# Altium PCB Jukebox - Copy.PCBDOC
Units mil, origin at the board's own origin, x right, y up, seen from the top; angles counter-clockwise.
Board outline 8310.03 x 5810.03 mil, 2 copper layers (Top Layer, Bottom Layer); 146 components, 239 nets, 1143 pads, 0 vias.
Unrouted connection lines stored in the file: 669.
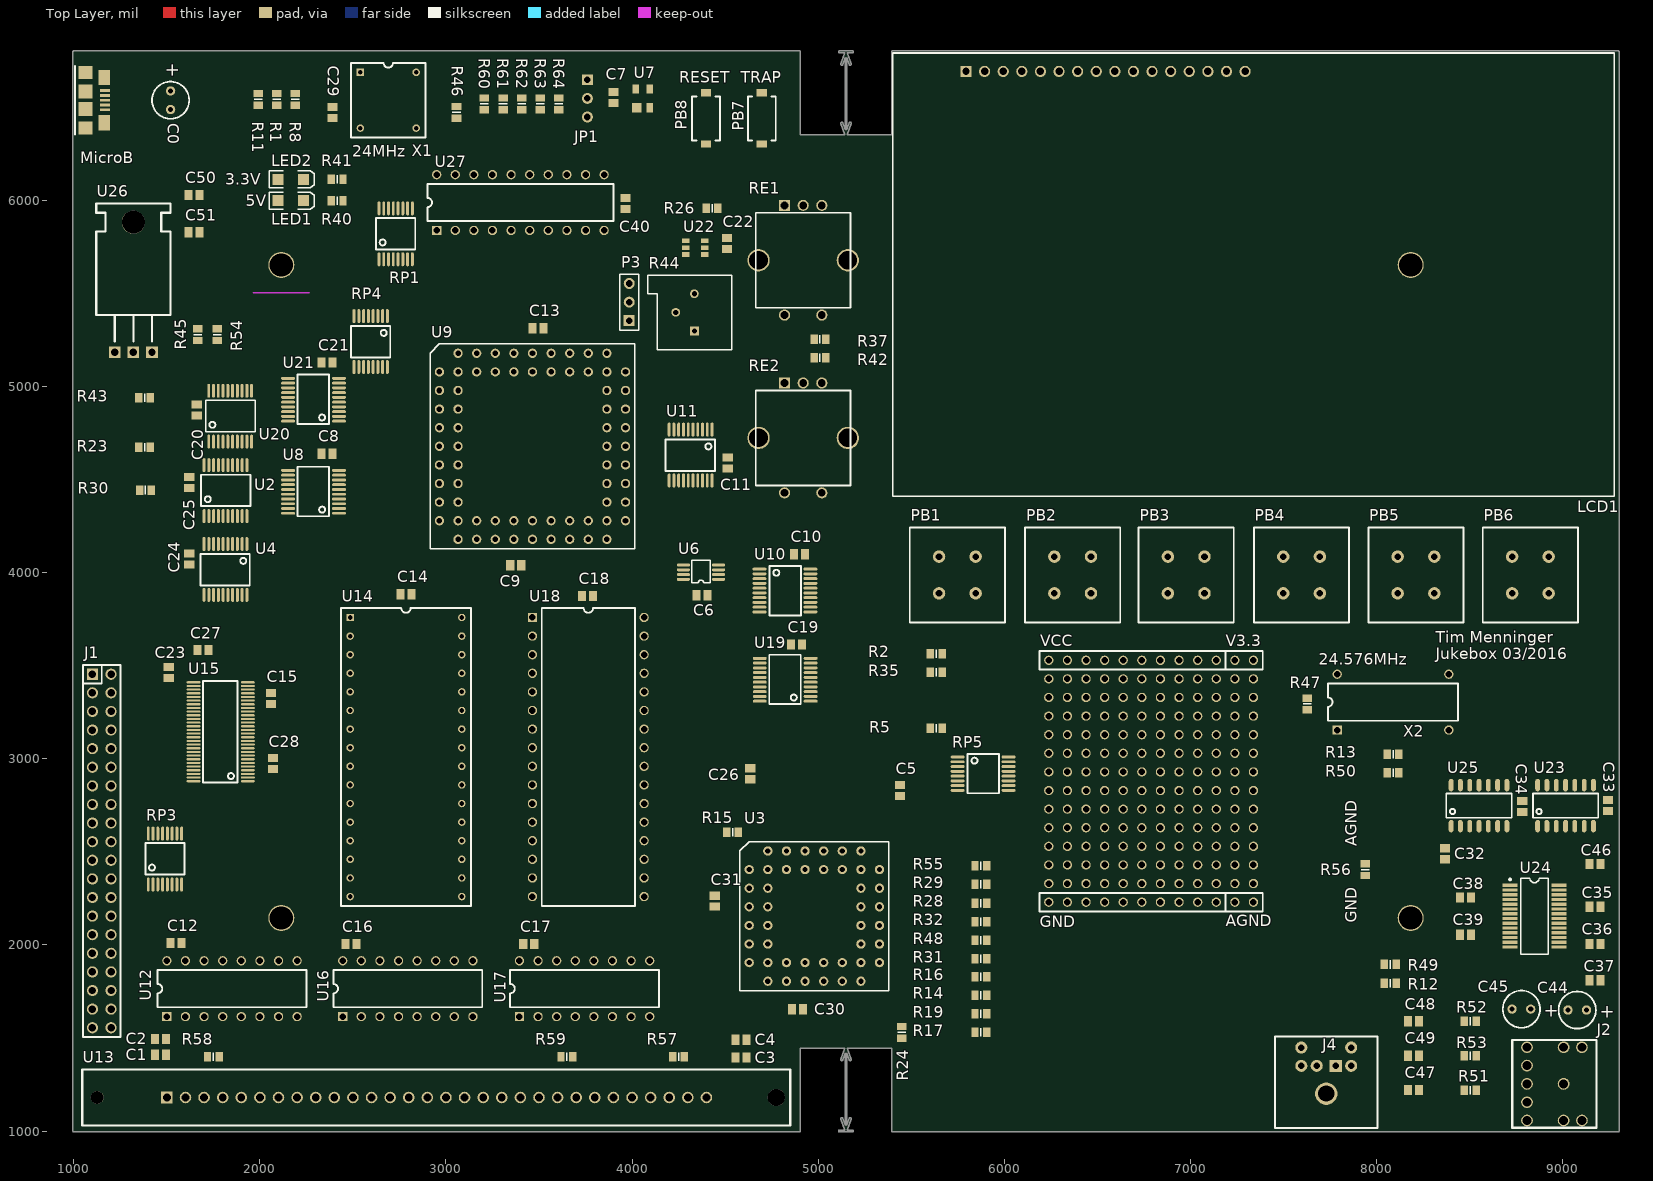
[diagram p0: Top Layer view]
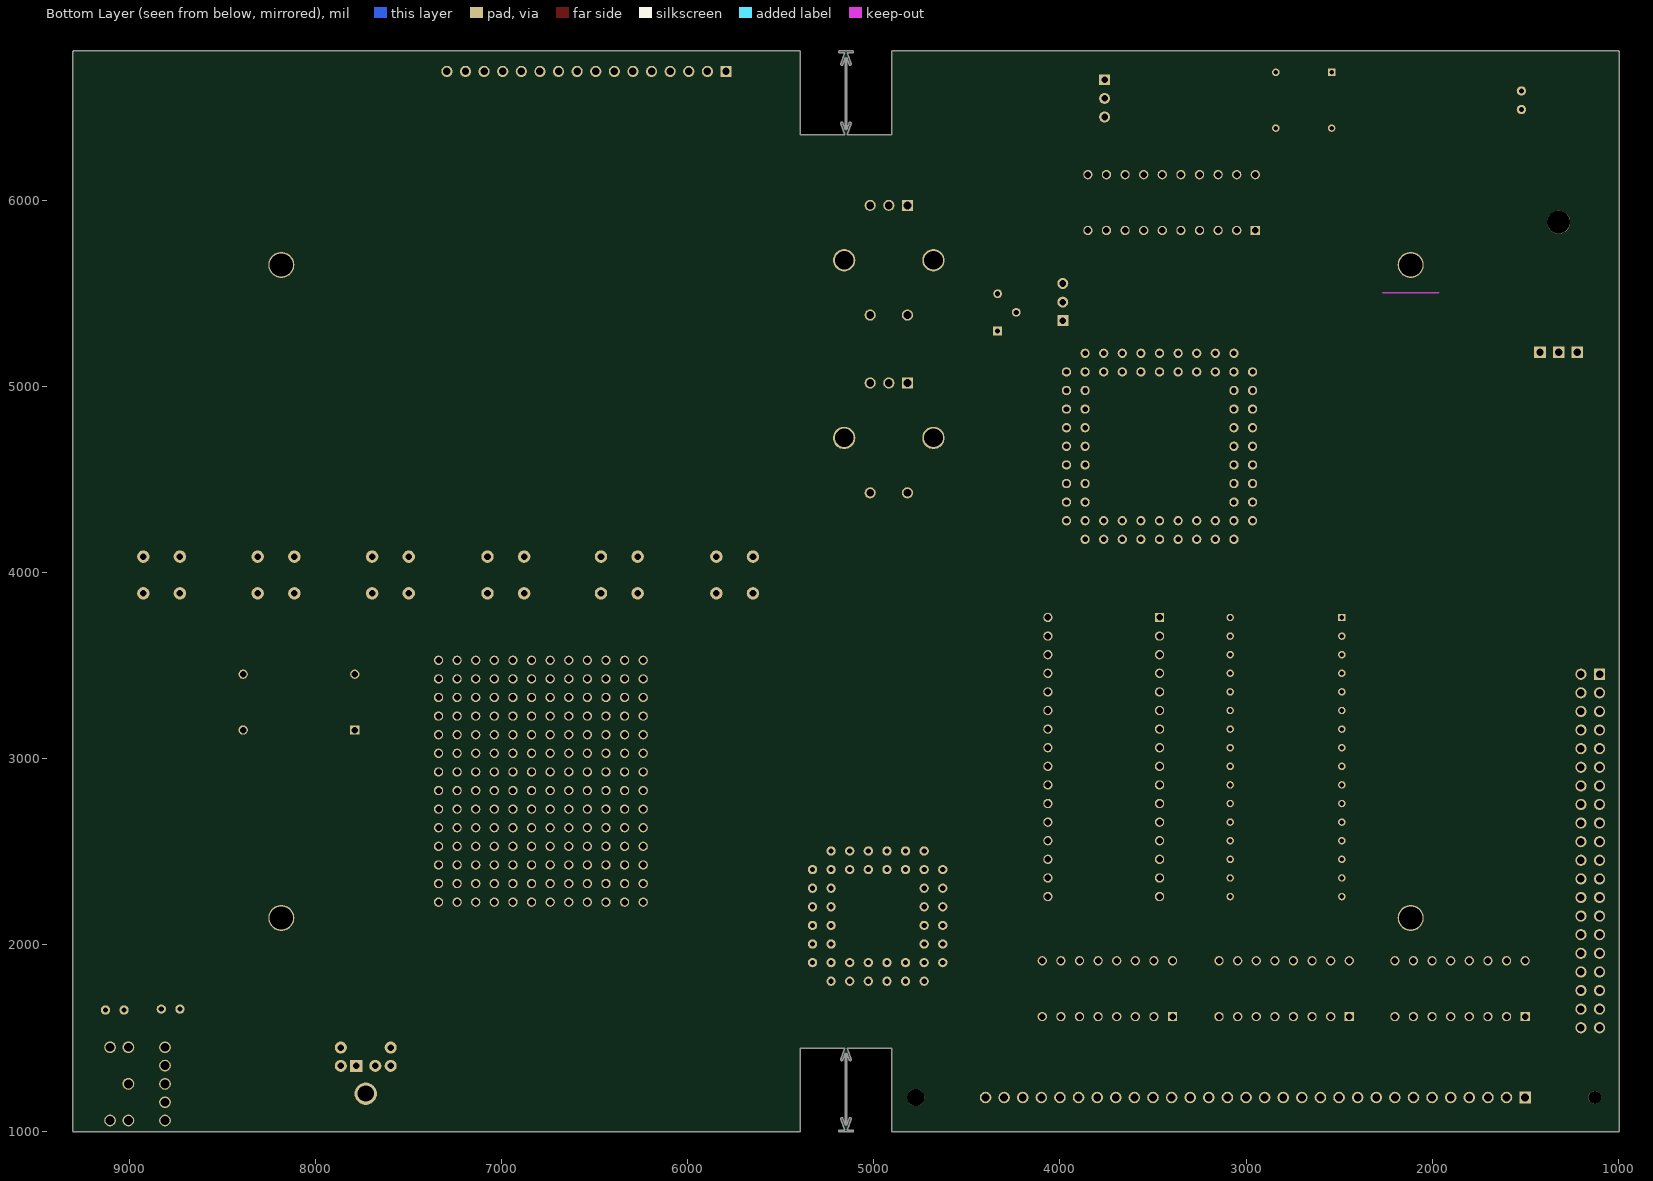
[diagram p1: Bottom Layer view, seen from below]

## Layer stack, top to bottom
Top Solder: solder mask 0.4, Solder Resist, Dk 3.5
Top Layer: signal copper 1.4
Dielectric1: dielectric 12.6, FR-4, Dk 4.8
Bottom Layer: signal copper 1.4
Bottom Solder: solder mask 0.4, Solder Resist, Dk 3.5

## Board outline
1000,994.99 cw(c1000,1000) 994.99,1000 994.99,6800 cw(c1000,6800) 1000,6805.02 4900,6805.02 cw(c4900,6800) 4905.02,6800 4905.02,6355.02 5143.04,6355.02 5122.95,6415.29 cw(c5127.71,6416.87) 5132.47,6418.46 5144.98,6380.9 5144.98,6769.1 5132.47,6731.54 cw(c5127.71,6733.13) 5122.95,6734.71 5143.04,6794.98 5115,6794.98 cw(c5115,6800) 5115,6805.02 5185,6805.02 cw(c5185,6800) 5190.02,6800 cw(c5185,6800) 5185,6794.98 5156.96,6794.98 5177.05,6734.71 cw(c5172.29,6733.13) 5177.31,6733.13 cw(c5172.29,6733.13) 5167.53,6731.54 5155.02,6769.1 5155.02,6380.9 5167.53,6418.46 cw(c5172.29,6416.87) 5177.31,6416.87 cw(c5172.29,6416.87) 5177.05,6415.29 5156.96,6355.02 5394.98,6355.02 5394.98,6800 cw(c5400,6800) 5400,6805.02 9300,6805.02 cw(c9300,6800) 9305.01,6800 9305.01,1000 cw(c9300,1000) 9300,994.99 5400,994.99 cw(c5400,1000) 5394.98,1000 5394.98,1444.98 5156.96,1444.98 5177.05,1384.71 cw(c5172.29,1383.13) 5177.31,1383.13 cw(c5172.29,1383.13) 5167.53,1381.54 5155.02,1419.1 5155.02,1030.9 5167.53,1068.46 cw(c5172.29,1066.87) 5177.31,1066.87 cw(c5172.29,1066.87) 5177.05,1065.29 5156.96,1005.01 5185,1005.01 cw(c5185,1000) 5190.02,1000 cw(c5185,1000) 5185,994.99 5115,994.99 cw(c5115,1000) 5115,1005.01 5143.04,1005.01 5122.95,1065.29 cw(c5127.71,1066.87) 5132.47,1068.46 5144.98,1030.9 5144.98,1419.1 5132.47,1381.54 cw(c5127.71,1383.13) 5122.95,1384.71 5143.04,1444.98 4905.02,1444.98 4905.02,1000 cw(c4900,1000) 4900,994.99

## Design rules (kind name [scope] priority, off if disabled: settings)
Clearance Clearance_9 [IsSMTPin vs IsFill] p1: gap=7.9
Clearance Clearance_8 [IsSMTPin vs IsVia] p2: gap=7.9
Clearance Clearance_7 [IsSMTPin vs IsSMTPin] p3: gap=7.8
Clearance Clearance_6 [IsThruPin vs IsFill] p4: gap=7.9
Clearance Clearance_5 [IsThruPin vs IsVia] p5: gap=7.9
Clearance Clearance_4 [IsThruPin vs IsSMTPin] p6: gap=7.8
Clearance Clearance_3 [IsThruPin vs IsThruPin] p7: gap=7.8
Clearance Clearance_2 [IsWire vs IsSMTPin] p8: gap=7.9
Clearance Clearance_1 [IsWire vs IsThruPin] p9: gap=7.9
Clearance [All] p10: gap=8
FabricationTestPointUsage TestPointUsage [All] p1: valid=0 allowmultiple=FALSE
FabricationTestpoint Testpoint [All] p1: side=3 testpointundercomponent=TRUE minsize=40 maxsize=100 preferedsize=60 minholesize=0 maxholesize=40 preferedholesize=32 testpointgrid=1 allowsidetop=TRUE allowsidebottom=TRUE usegrid=TRUE gridtolerance=0.01
PlaneClearance [All] p1: clearance=10
PolygonConnect [All] p1: connectstyle=Relief reliefconductorwidth=10 reliefentries=4 polygonreliefangle="90 Angle" airgapwidth=10
RoomDefinition "Jukebox Schematic" [InComponentClass('Jukebox Schematic')] p1: confinementstyle=ConfineIn formatcopy=TRUE lockcomponents=FALSE outline 0,0 2000,0 2000,1000 0,1000
RoomDefinition "Jukebox Processing" [InComponentClass('Jukebox Processing')] p2: confinementstyle=ConfineIn formatcopy=TRUE lockcomponents=FALSE outline 9350,14120 19430,14120 19430,15340 9350,15340
RoomDefinition "Jukebox Power" [InComponentClass('Jukebox Power')] p3: confinementstyle=ConfineIn formatcopy=TRUE lockcomponents=FALSE outline 9350,13140 21035,13140 21035,14070 9350,14070
RoomDefinition "Jukebox Peripherals" [InComponentClass('Jukebox Peripherals')] p4: confinementstyle=ConfineIn formatcopy=TRUE lockcomponents=FALSE outline 9350,5040 25580,5040 25580,13090 9350,13090
RoomDefinition "Jukebox Memory" [InComponentClass('Jukebox Memory')] p5: confinementstyle=ConfineIn formatcopy=TRUE lockcomponents=FALSE outline 9350,1055 16010,1055 16010,4990 9350,4990
RoutingVias [All] p1: holewidth=28 width=50 viastyle="Through Hole" minholewidth=28 minwidth=50 maxholewidth=28 maxwidth=50
SolderMaskExpansion [All] p1: expansion=2
UnpouredPolygon [All] p1: allowunpoured=FALSE
Width "Schematic Width Constraint_3" [InNet('VCC')] p1: maxlimit=30 minlimit=8 preferedwidth=30
Width "Schematic Width Constraint_2" [InNet('GND')] p2: maxlimit=30 minlimit=8 preferedwidth=30
Width "Schematic Width Constraint_1" [InNet('V3.3')] p3: maxlimit=30 minlimit=8 preferedwidth=30
Width "Schematic Width Constraint" [InNet('AGND')] p4: maxlimit=30 minlimit=8 preferedwidth=30
Width [All] p5: maxlimit=10 minlimit=10 preferedwidth=10
26 further rules are at their usual default settings.

## Classes and differential pairs
component class "Jukebox Memory": J1 R23 R30 R35 R57 R58 R59 RP3 U12 U13 U14 U15 U16 U17 U18
component class "Jukebox Peripherals": C44 C45 C46 C47 C48 C49 J2 J4 LCD1 P3 PB1 PB2 PB3 PB4 PB5 PB6 R12 R13 R24 R26 R37 R42 R43 R44 R47 R49 R50 R51 R52 R53 RE1 RE2 RP4 U19 U20 U21 U22 U23 U24 U25 X2
component class "Jukebox Power": C0 C1 C2 C3 C4 C5 C6 C7 C8 C9 C10 C11 C12 C13 C14 C15 C16 C17 C18 C19 C20 C21 C22 C23 C24 C25 C26 C27 C28 C29 C30 C31 C32 C33 C34 C35 C36 C37 C38 C39 C40 C50 C51 LED1 LED2 MicroB R40 R41 R45 R54 R56 U26
component class "Jukebox Processing": JP1 PB7 PB8 R1 R2 R5 R8 R11 R14 R15 R16 R17 R19 R28 R29 R31 R32 R46 R48 R55 R60 R61 R62 R63 R64 RP1 RP5 U2 U3 U4 U6 U7 U8 U9 U10 U11 U27 X1

## Components (designator, comment, footprint, x,y, rotation, side; value= is the part's Value field where it differs from the comment)
C0 "Cap Pol3" RB.1/.2 1520,6490 r90 top
C1 "Cap Pol3" C0805 1465,1410 r180 top
C2 "Cap" C0805 1465,1495 r180 top
C3 "Cap Pol3" C0805 4585,1395 r0 top
C4 "Cap" C0805 4585,1490 r0 top
C5 "Cap" C0805 5440,2830 r90 top
C6 "Cap" C0805 4375,3880 r0 top
C7 "Cap" C0805 3900,6555 r90 top
C8 "Cap" C0805 2360,4640 r0 top
C9 "Cap" C0805 3375,4040 r0 top
C10 "Cap" C0805 4900,4100 r180 top
C11 "Cap" C0805 4515,4590 r270 top
C12 "Cap" C0805 1550,2010 r0 top
C13 "Cap" C0805 3495,5315 r180 top
C14 "Cap" C0805 2785,3885 r180 top
C15 "Cap" C0805 2060,3325 r270 top
C16 "Cap" C0805 2490,2005 r0 top
C17 "Cap" C0805 3445,2005 r0 top
C18 "Cap" C0805 3760,3875 r180 top
C19 "Cap" C0805 4885,3615 r180 top
C20 "Cap" C0805 1660,4875 r270 top
C21 "Cap" C0805 2360,5130 r0 top
C22 "Cap" C0805 4510,5770 r90 top
C23 "Cap" C0805 1510,3465 r270 top
C24 "Cap" C0805 1620,4075 r270 top
C25 "Cap" C0805 1620,4485 r270 top
C26 "Cap" C0805 4635,2920 r90 top
C27 "Cap" C0805 1695,3585 r180 top
C28 "Cap" C0805 2070,2975 r90 top
C29 "Cap" C0805 2390,6475 r270 top
C30 "Cap" C0805 4890,1655 r180 top
C31 "Cap" C0805 4445,2235 r90 top
C32 "Cap" C0805 8370,2490 r90 top
C33 "Cap" C0805 9245,2750 r270 top
C34 "Cap" C0805 8785,2745 r90 top
C35 "Cap" C0805 9175,2205 r0 top
C36 "Cap" C0805 9175,2005 r0 top
C37 "Cap" C0805 9175,1810 r0 top
C38 "Cap" C0805 8480,2255 r180 top
C39 "Cap" C0805 8480,2055 r180 top
C40 "Cap" C0805 3965,5985 r90 top
C44 "Cap Pol3" RB.1/.2 9030,1650 r0 top
C45 "Cap Pol3" RB.1/.2 8730,1655 r0 top
C46 "Cap Pol3" C0805 9175,2435 r0 top
C47 "Cap" C0805 8200,1220 r180 top
C48 "Cap" C0805 8200,1590 r180 top
C49 "Cap" C0805 8200,1405 r180 top
C50 "Cap Pol3" C0805 1645,6030 r180 top
C51 "Cap Pol3" C0805 1645,5830 r180 top
J1 "IDE40" SIP2X20 1100,3455 r270 top
J2 "PHONEJACK STEREO SW" SJ1-352 8810,1450 r0 top
J4 "CON_MP3" MDIN6 7865,1350 r180 top
JP1 "3P_JP" HDR1X3 3760,6650 r270 top
LCD1 "NHD-0420DZ-FSW-FBW" 20x4Disp 5795,6695 r0 top
LED1 "5V PWR" 3.2X1.6X1.1 2165,6000 r0 top
LED2 "3.3V PWR" 3.2X1.6X1.1 2165,6115 r0 top
MicroB "Micro B" 10118192 1025,6725 r270 top
P3 "Header 3" HDR1X3 3985,5355 r90 top
PB1 "SW-PB" PB_EG4791 5650,3890 r0 top
PB2 "SW-PB" PB_EG4791 6270,3890 r0 top
PB3 "SW-PB" PB_EG4791 6880,3890 r0 top
PB4 "SW-PB" PB_EG4791 7500,3890 r0 top
PB5 "SW-PB" PB_EG4791 8115,3890 r0 top
PB6 "SW-PB" PB_EG4791 8730,3890 r0 top
PB7 "SWITCH-PBNC" KSR_PB_NC 4725,6285 r90 top
PB8 "SW-PB" KSR_PB_NC 4370,6600 r270 top
R1 "Res1" 6-0805_L 2090,6545 r270 top
R2 "Res1" 6-0805_L 5635,3565 r180 top
R5 "Res1" 6-0805_L 5635,3165 r180 top
R8 "Res1" 6-0805_L 2190,6545 r90 top
R11 "Res1" 6-0805_L 1990,6545 r270 top
R12 "Res1" 6-0805_L 8075,1795 r0 top
R13 "Res1" 6-0805_L 8090,3025 r180 top
R14 "Res1" 6-0805_L 5875,1730 r180 top
R15 "Res1" 6-0805_L 4540,2605 r0 top
R16 "Res1" 6-0805_L 5875,1830 r180 top
R17 "Res1" 6-0805_L 5875,1530 r180 top
R19 "Res1" 6-0805_L 5875,1630 r180 top
R23 "Res1" 6-0805_L 1380,4675 r180 top
R24 "Res1" 6-0805_L 5450,1530 r90 top
R26 "Res1" 6-0805_L 4430,5960 r0 top
R28 "Res1" 6-0805_L 5875,2225 r0 top
R29 "Res1" 6-0805_L 5875,2325 r0 top
R30 "Res1" 6-0805_L 1385,4445 r0 top
R31 "Res1" 6-0805_L 5875,1925 r0 top
R32 "Res1" 6-0805_L 5875,2125 r0 top
R35 "Res1" 6-0805_L 5635,3465 r0 top
R37 "Res1" 6-0805_L 5010,5255 r180 top
R40 "Res1" 6-0805_L 2415,6000 r180 top
R41 "Res1" 6-0805_L 2415,6115 r180 top
R42 "Res1" 6-0805_L 5010,5155 r180 top
R43 "Res1" 6-0805_L 1380,4940 r0 top
R44 "RPot" VR4 4285,5400 r90 top
R45 "Res1" 6-0805_L 1665,5280 r90 top
R46 "Res1" 6-0805_L 3056.65,6475 r90 top
R47 "Res1" 6-0805_L 7630,3295 r270 top
R48 "Res1" 6-0805_L 5875,2025 r0 top
R49 "Res1" 6-0805_L 8075,1895 r0 top
R50 "Res1" 6-0805_L 8090,2925 r180 top
R51 "Res1" 6-0805_L 8505,1220 r0 top
R52 "Res1" 6-0805_L 8505,1590 r0 top
R53 "Res1" 6-0805_L 8505,1405 r0 top
R54 "Res1" 6-0805_L 1770,5280 r90 top
R55 "Res1" 6-0805_L 5875,2425 r180 top
R56 "Res1" 6-0805_L 7940,2405 r270 top
R57 "Res1" 6-0805_L 4250,1400 r0 top
R58 "Res1" 6-0805_L 1750,1400 r0 top
R59 "Res1" 6-0805_L 3650,1400 r0 top
R60 "Res1" 6-0805_L 3206.65,6520 r270 top
R61 "Res1" 6-0805_L 3306.65,6520 r270 top
R62 "Res1" 6-0805_L 3406.65,6520 r270 top
R63 "Res1" 6-0805_L 3506.65,6520 r90 top
R64 "Res1" 6-0805_L 3606.65,6520 r90 top
RE1 "SW-ROTARY&PB" ROTENCPB 4820,5975 r0 top
RE2 "SW-ROTARY&PB" ROTENCPB 4820,5020 r0 top
RP1 "10K" SSOP16 2640,5685 r0 top
RP3 "10K" SSOP16 1400,2325 r0 top
RP4 "10K" SSOP16 2685,5380 r180 top
RP5 "10K" SSOP16 5750,3010 r270 top
U2 "74ALS245" SSOP20 1700,4305 r0 top
U3 "ISPLSI1016E" PLCCS44 4630,2505 r0 top
U4 "74ALS573" SSOP20 1930,4155 r180 top
U6 "MAX709" UMAX8 4465,3965 r180 top
U7 "MAX6816" SOT-143 4025,6500 r0 top
U8 "74ALS245" SSOP20 2425,4320 r90 top
U9 "80C188XL" PLCCS68I 2965,5180 r0 top
U10 "74ALS573" SSOP20 4685,4020 r270 top
U11 "74HCT244" SSOP20 4430,4770 r180 top
U12 "74LS158" DIP16 1500,1615 r90 top
U13 "TM124GU8A" SIMM30 1500,1180 r0 top
U14 "AM28F020-200PC" DIPS32 2485,3760 r0 top
U15 "74FCT162646" TSSOP56 1935,2880 r90 top
U16 "74LS158" DIP16 2445,1615 r90 top
U17 "74LS158" DIP16 3395,1615 r90 top
U18 "HM628128B" DIP32 3465,3760 r0 top
U19 "MAX6818" SSOP20 4960,3310 r90 top
U20 "74ALS245" SSOP20 1725,4705 r0 top
U21 "74ALS245" SSOP20 2425,4815 r90 top
U22 "MCP4013" SOT-23-6 4390,5710 r90 top
U23 "74LCX125" "SOIC 14" 9180,2605 r90 top
U24 "VS1011E" SOIC28 8850,2155 r270 top
U25 "74LCX125" "SOIC 14" 8715,2605 r90 top
U26 "LM1086" TO-220 1220,5185 r0 top
U27 "GAL16V8" DIP20 2950,5840 r90 top
X1 "OSCOE" DIPS8-4 2540,6690 r0 top
X2 "OSCOE" DIP14-4 7790,3155 r90 top

## Footprints (in the part's own frame and the unit in brackets; to place one, negate y for a bottom-side part, rotate by r counter-clockwise, add the part's x,y. Pads: shape width x height; smd on the part's side, far side on the other; paste and mask are expansions set on the pad)
3.2X1.6X1.1 [mm] "SMT LED; 2 Flat Leads"
  rect 1.5x1.5 smd: 1(-1.75,0) 2(1.75,0)
  silkscreen extent -2.9,-1.15 3.2,1.15
6-0805_L [mm] "Chip Resistor, Body 2.0x1.2mm, IPC High Density"
  rect 1x1.3 smd: 1(-0.8,0) 2(0.8,0)
  silkscreen extent 0,-0.55 0,0.55, body extent -1.07,-0.7 1.07,0.7, height 0.7
20x4Disp [mil]
  rect 60x60 hole 40: 1(0,0)
  round 60 hole 40: 2(100,0) 3(200,0) 4(300,0) 5(400,0) 6(500,0) 7(600,0) 8(700,0) 9(800,0) 10(900,0) 11(1000,0) 12(1100,0) 13(1200,0) 14(1300,0) 15(1400,0) 16(1500,0)
  silkscreen extent -394,-2283 3484,98
10118192 [mm] "Micro B USB"
  rect 0.4x1.35 smd: 1(3.4,3.625) 2(4.05,3.625) 3(4.7,3.625) 4(5.35,3.625) 5(6,3.625)
  rect 1.8x1.9 smd: ""(0.9,0.95) ""(8.5,0.95)
  rect 2.1x1.6 smd: ""(1.6,3.5) ""(7.8,3.5)
  rect 1.9x1.9 smd: ""(3.5,0.95) ""(5.9,0.95)
  silkscreen extent 0,-0.5 9.4,-0.5
C0805 [mm] "Chip Capacitor, Body 2.0x1.3mm, IPC High Density"
  rect 1.1x1.4 smd: 1(-0.75,0) 2(0.75,0)
  body extent -1.1,-0.72 1.1,0.72, height 1.4
DIP14-4 [mil]
  rect 50x50 hole 35: 1(0,0)
  round 50 hole 35: 2(0,-600) 3(300,-600) 4(300,0)
  silkscreen extent 50,-650 250,50
DIP16 [mil]
  rect 50x50 hole 35: 1(0,0)
  round 50 hole 35: 2(0,-100) 3(0,-200) 4(0,-300) 5(0,-400) 6(0,-500) 7(0,-600) 8(0,-700) 9(300,-700) 10(300,-600) 11(300,-500) 12(300,-400) 13(300,-300) 14(300,-200) 15(300,-100) 16(300,0)
  silkscreen extent 50,-750 250,50
DIP20 [mil]
  rect 50x50 hole 35: 1(0,0)
  round 50 hole 35: 2(0,-100) 3(0,-200) 4(0,-300) 5(0,-400) 6(0,-500) 7(0,-600) 8(0,-700) 9(0,-800) 10(0,-900) 11(300,-900) 12(300,-800) 13(300,-700) 14(300,-600) 15(300,-500) 16(300,-400) 17(300,-300) 18(300,-200) 19(300,-100) 20(300,0)
  silkscreen extent 50,-950 250,50
DIP32 [mil]
  rect 50x50 hole 35: 1(0,0)
  round 50 hole 35: 2(0,-100) 3(0,-200) 4(0,-300) 5(0,-400) 6(0,-500) 7(0,-600) 8(0,-700) 9(0,-800) 10(0,-900) 11(0,-1000) 12(0,-1100) 13(0,-1200) 14(0,-1300) 15(0,-1400) 16(0,-1500) 17(600,-1500) 18(600,-1400) 19(600,-1300) 20(600,-1200) 21(600,-1100) 22(600,-1000) 23(600,-900) 24(600,-800) 25(600,-700) 26(600,-600) 27(600,-500) 28(600,-400) 29(600,-300) 30(600,-200) 31(600,-100) 32(600,0)
  silkscreen extent 50,-1550 550,50
DIPS8-4 [mil]
  rect 40x40 hole 25: 1(0,0)
  round 40 hole 25: 2(0,-300) 3(300,-300) 4(300,0)
  silkscreen extent -50,-350 350,50
DIPS32 [mil]
  rect 40x40 hole 25: 1(0,0)
  round 40 hole 25: 2(0,-100) 3(0,-200) 4(0,-300) 5(0,-400) 6(0,-500) 7(0,-600) 8(0,-700) 9(0,-800) 10(0,-900) 11(0,-1000) 12(0,-1100) 13(0,-1200) 14(0,-1300) 15(0,-1400) 16(0,-1500) 17(600,-1500) 18(600,-1400) 19(600,-1300) 20(600,-1200) 21(600,-1100) 22(600,-1000) 23(600,-900) 24(600,-800) 25(600,-700) 26(600,-600) 27(600,-500) 28(600,-400) 29(600,-300) 30(600,-200) 31(600,-100) 32(600,0)
  silkscreen extent -50,-1550 650,50
HDR1X3 [mm] "Connector; Header; 3 Position"
  rect 1.5x1.5 hole 0.9: 1(0,0)
  round 1.5 hole 0.9: 2(2.54,0) 3(5.08,0)
KSR_PB_NC [mm] "Pushbutton SPST NC"
  rect 1x1.4 smd: 1(0.5,0.7) 2(7.5,0.7)
  silkscreen extent 1,-1.2 7,2.6
MDIN6 [mil]
  rect 65x65 hole 35: 1(82.68,0)
  round 65 hole 35: 2(185.04,0) 3(0,0) 4(267.72,0) 5(0,-98.43) 6(267.72,-98.43)
  round 120 hole 86: A(133.86,149.61)
  silkscreen extent -142,-157 409,335
PB_EG4791 [mm]
  round 1.7 hole 0.9: 1(0,5) 2(5,5) 3(0,0) 4(5,0)
  silkscreen extent -4,-4 9,9
PLCCS44 [mil]
  round 50 hole 28: 1(400,-100) 2(300,0) 3(300,-100) 4(200,0) 5(200,-100) 6(100,0) 7(0,-100) 8(100,-100) 9(0,-200) 10(100,-200) 11(0,-300) 12(100,-300) 13(0,-400) 14(100,-400) 15(0,-500) 16(100,-500) 17(0,-600) 18(100,-700) 19(100,-600) 20(200,-700) 21(200,-600) 22(300,-700) 23(300,-600) 24(400,-700) 25(400,-600) 26(500,-700) 27(500,-600) 28(600,-700) 29(700,-600) 30(600,-600) 31(700,-500) 32(600,-500) 33(700,-400) 34(600,-400) 35(700,-300) 36(600,-300) 37(700,-200) 38(600,-200) 39(700,-100) 40(600,0) 41(600,-100) 42(500,0) 43(500,-100) 44(400,0)
  silkscreen extent -50,-750 750,50
PLCCS68I [mil]
  round 50 hole 30: 1(0,-100) 2(100,-100) 3(0,-200) 4(100,-200) 5(0,-300) 6(100,-300) 7(0,-400) 8(100,-400) 9(0,-500) 10(100,-500) 11(0,-600) 12(100,-600) 13(0,-700) 14(100,-700) 15(0,-800) 16(100,-800) 17(0,-900) 18(100,-1000) 19(100,-900) 20(200,-1000) 21(200,-900) 22(300,-1000) 23(300,-900) 24(400,-1000) 25(400,-900) 26(500,-1000) 27(500,-900) 28(600,-1000) 29(600,-900) 30(700,-1000) 31(700,-900) 32(800,-1000) 33(800,-900) 34(900,-1000) 35(1000,-900) 36(900,-900) 37(1000,-800) 38(900,-800) 39(1000,-700) 40(900,-700) 41(1000,-600) 42(900,-600) 43(1000,-500) 44(900,-500) 45(1000,-400) 46(900,-400) 47(1000,-300) 48(900,-300) 49(1000,-200) 50(900,-200) 51(1000,-100) 52(900,0) 53(900,-100) 54(800,0) 55(800,-100) 56(700,0) 57(700,-100) 58(600,0) 59(600,-100) 60(500,0) 61(500,-100) 62(400,0) 63(400,-100) 64(300,0) 65(300,-100) 66(200,0) 67(200,-100) 68(100,0)
  silkscreen extent -50,-1050 1050,50
RB.1/.2 [mil]
  round 50 hole 28: 1(100,0) 2(0,0)
  silkscreen extent -50,-100 150,100
ROTENCPB [mil]
  rect 60x60 hole 42: 1(0,0)
  round 60 hole 42: 2(100,0) 3(200,0) 4(200,-590) 5(0,-590)
  round 120 hole 100: ""(-140,-295) ""(340,-295)
  silkscreen extent -155,-550 355,-40
SIMM30 [mil]
  rect 62x62 hole 42: 1(0,0)
  round 62 hole 42: 2(100,0) 3(200,0) 4(300,0) 5(400,0) 6(500,0) 7(600,0) 8(700,0) 9(800,0) 10(900,0) 11(1000,0) 12(1100,0) 13(1200,0) 14(1300,0) 15(1400,0) 16(1500,0) 17(1600,0) 18(1700,0) 19(1800,0) 20(1900,0) 21(2000,0) 22(2100,0) 23(2200,0) 24(2300,0) 25(2400,0) 26(2500,0) 27(2600,0) 28(2700,0) 29(2800,0) 30(2900,0)
  round 70 hole 70: ""(-375,0)
  round 92 hole 92: ""(3275,0)
  silkscreen extent -455,-150 3350,150
SIP2X20 [mil]
  rect 60x60 hole 40: 1(0,0)
  round 60 hole 40: 2(0,100) 3(100,0) 4(100,100) 5(200,0) 6(200,100) 7(300,0) 8(300,100) 9(400,0) 10(400,100) 11(500,0) 12(500,100) 13(600,0) 14(600,100) 15(700,0) 16(700,100) 17(800,0) 18(800,100) 19(900,0) 20(900,100) 21(1000,0) 22(1000,100) 23(1100,0) 24(1100,100) 25(1200,0) 26(1200,100) 27(1300,0) 28(1300,100) 29(1400,0) 30(1400,100) 31(1500,0) 32(1500,100) 33(1600,0) 34(1600,100) 35(1700,0) 36(1700,100) 37(1800,0) 38(1800,100) 39(1900,0) 40(1900,100)
  silkscreen extent -50,-50 1950,150
SJ1-352 [mm]
  round 1.6 hole 1.2: A(0,-10) B(0,-7.5) C(0,-2.5) D(0,0) E(5,-5) ""(0,-5) ""(5,-10) ""(5,0) ""(7.5,-10) ""(7.5,0)
  silkscreen extent -2,-11 9.5,1
SOIC28 [mm] "SSOP; 28 Leads; Body Width 5.3 mm; Pitch 0.65 mm"
  rect 0.45x2.05 smd: 1(-4.225,-3.325) 2(-3.575,-3.325) 3(-2.925,-3.325) 4(-2.275,-3.325) 5(-1.625,-3.325) 6(-0.975,-3.325) 7(-0.325,-3.325) 8(0.325,-3.325) 9(0.975,-3.325) 10(1.625,-3.325) 11(2.275,-3.325) 12(2.925,-3.325) 13(3.575,-3.325) 14(4.225,-3.325) 15(4.225,3.325) 16(3.575,3.325) 17(2.925,3.325) 18(2.275,3.325) 19(1.625,3.325) 20(0.975,3.325) 21(0.325,3.325) 22(-0.325,3.325) 23(-0.975,3.325) 24(-1.625,3.325) 25(-2.275,3.325) 26(-2.925,3.325) 27(-3.575,3.325) 28(-4.225,3.325)
  silkscreen extent -5.2,-3.45 5.2,1.9
"SOIC 14" [mm]
  oval 1.7x0.65 smd: 1(0.85,7.945) 2(0.85,6.675) 3(0.85,5.405) 4(0.85,4.135) 5(0.85,2.865) 6(0.85,1.595) 7(0.85,0.325) 8(6.45,0.325) 9(6.45,1.595) 10(6.45,2.865) 11(6.45,4.135) 12(6.45,5.405) 13(6.45,6.675) 14(6.45,7.945)
  silkscreen extent 2,-0.33 5.3,8.6
SOT-23-6 [mil]
  rect 26x40 smd: 1(0,0) 2(37.5,0) 3(75,0) 4(75,102) 5(37.5,102) 6(0,102)
SOT-143 [mil]
  rect 50x50 smd: 1(0,0)
  rect 35x50 smd: 2(70,0) 3(70,100) 4(-5,100)
SSOP16 [mm]
  oval 0.4x1.9 smd: 1(0,0) 2(0.65,0) 3(1.3,0) 4(1.95,0) 5(2.6,0) 6(3.25,0) 7(3.9,0) 8(4.55,0) 9(4.55,6.95) 10(3.9,6.95) 11(3.25,6.95) 12(2.6,6.95) 13(1.95,6.95) 14(1.3,6.95) 15(0.65,6.95) 16(0,6.95)
  silkscreen extent -0.4,1.35 4.95,5.65
SSOP20 [mm]
  oval 0.4x1.9 smd: 1(0,0) 2(0.65,0) 3(1.3,0) 4(1.95,0) 5(2.6,0) 6(3.25,0) 7(3.9,0) 8(4.55,0) 9(5.2,0) 10(5.85,0) 11(5.85,6.95) 12(5.2,6.95) 13(4.55,6.95) 14(3.9,6.95) 15(3.25,6.95) 16(2.6,6.95) 17(1.95,6.95) 18(1.3,6.95) 19(0.65,6.95) 20(0,6.95)
  silkscreen extent -0.4,1.35 6.35,5.65
TO-220 [mil]
  round 125 hole 125: 0(100,700)
  rect 62x62 hole 40: 1(0,0) 2(100,0) 3(200,0)
  silkscreen extent -100,60 300,800
TSSOP56 [mm]
  oval 0.3x1.9 smd: 1(0,0) 2(0.5,0) 3(1,0) 4(1.5,0) 5(2,0) 6(2.5,0) 7(3,0) 8(3.5,0) 9(4,0) 10(4.5,0) 11(5,0) 12(5.5,0) 13(6,0) 14(6.5,0) 15(7,0) 16(7.5,0) 17(8,0) 18(8.5,0) 19(9,0) 20(9.5,0) 21(10,0) 22(10.5,0) 23(11,0) 24(11.5,0) 25(12,0) 26(12.5,0) 27(13,0) 28(13.5,0) 29(13.5,7.4) 30(13,7.4) 31(12.5,7.4) 32(12,7.4) 33(11.5,7.4) 34(11,7.4) 35(10.5,7.4) 36(10,7.4) 37(9.5,7.4) 38(9,7.4) 39(8.5,7.4) 40(8,7.4) 41(7.5,7.4) 42(7,7.4) 43(6.5,7.4) 44(6,7.4) 45(5.5,7.4) 46(5,7.4) 47(4.5,7.4) 48(4,7.4) 49(3.5,7.4) 50(3,7.4) 51(2.5,7.4) 52(2,7.4) 53(1.5,7.4) 54(1,7.4) 55(0.5,7.4) 56(0,7.4)
  silkscreen extent -0.2,1.4 13.7,6.1
UMAX8 [mm]
  oval 1.8x0.4 smd: 1(0,0) 2(0,-0.65) 3(0,-1.3) 4(0,-1.95) 5(4.8,-1.95) 6(4.8,-1.3) 7(4.8,-0.65) 8(4.8,0)
  silkscreen extent 1.15,-2.6 3.65,0.5
VR4 [mm] "Thru-Hole; 3 Leads"
  rect 1.2x1.2 hole 0.7: 1(-2.54,-1.27)
  round 1.2 hole 0.7: 2(0,1.27) 3(2.54,-1.27)
  silkscreen extent -5.08,-6.35 5.08,5.08

## Part data
C0 C1 C3 C44 C45 C46 C50 C51: "Polarized Capacitor (Surface Mount)"
C2 C4 C5 C6 C7 C8 C9 C10 C11 C12 C13 C14 C15 C16 C17 C18 C19 C20 C21 C22 C23 C24 C25 C26 C27 C28 C29 C30 C31 C32 C33 C34 C35 C36 C37 C38 C39 C40 C47 C48 C49: "Capacitor"
J1: "40-Pin IDE Connector"
J2: "3.5mm Stereo Jack with Switches"
J4: "MP3 Connector"
LCD1: library part LCDBL16PIN, "Single E LCD with Backlight"
LED1 LED2: library part LED2, "Typical RED, GREEN, YELLOW, AMBER GaAs LED"
MicroB: library part "10118192 Micro B USB"
P3: "Header, 3-Pin"
PB1 PB2 PB3 PB4 PB5 PB6 PB8: "Switch"
PB7: "Normally Closed Pushbutton Switch"
R1 R2 R5 R8 R11 R12 R13 R14 R15 R16 R17 R19 R23 R24 R26 R28 R29 R30 R31 R32 R35 R37 R40 R41 R42 R43 R45 R46 R47 R48 R49 R50 R51 R52 R53 R54 R55 R56 R57 R58 R59 R60 R61 R62 R63 R64: "Resistor"
R44: "Potentiometer"
RE1 RE2: "Rotary Encoder with Built-In Push Button"
RP1 RP3 RP4 RP5: library part RPACK8, "Resistor Pack - 8 Resistors"
U2 U8 U20 U21: "Octal Bus Transceiver"
U3: library part ISPLSI1016, "In-System Programmable High Density CPLD"
U4 U10: "Octal Transparent Latch"
U6: "Maxim Power-On Reset"
U7: "Single Switch Debouncer"
U9: "Intel 80188 Microprocessor"
U11: "Octal Buffer"
U13: library part DRAM1MX8, "1M x 8 DRAM SIMM"
U14: library part UNIROM, "Universal EPROM/EEROM Socket"
U15: library part 74FCT16646, "16-Bit Bus Transceiver/Register"
U18: library part UNIRAM, "Universal RAM Socket"
U19: "Octal Switch Debouncer"
U26: "1.5A Low Dropout Positive Regulator"
X1 X2: "Oscillator with Active High Output Enable"

## Free pads (board coordinates)
  round 140 hole 125: 1(2115,2145) 2(2115,5655) 3(8185,2145) 4(8185,5655)
  round 50 hole 35: 26(6240,2230) 26(6340,2230) 26(6440,2230) 26(6540,2230) 26(6640,2230) 26(6740,2230) 26(6840,2230) 26(6940,2230) 26(7040,2230) 26(7140,2230) 26(7240,2230) 26(7340,2230) 27(6240,2330) 27(6340,2330) 27(6440,2330) 27(6540,2330) 27(6640,2330) 27(6740,2330) 27(6840,2330) 27(6940,2330) 27(7040,2330) 27(7140,2330) 27(7240,2330) 27(7340,2330) 28(6240,2430) 28(6340,2430) 28(6440,2430) 28(6540,2430) 28(6640,2430) 28(6740,2430) 28(6840,2430) 28(6940,2430) 28(7040,2430) 28(7140,2430) 28(7240,2430) 28(7340,2430) 29(6240,2530) 29(6340,2530) 29(6440,2530) 29(6540,2530) 29(6640,2530) 29(6740,2530) 29(6840,2530) 29(6940,2530) 29(7040,2530) 29(7140,2530) 29(7240,2530) 29(7340,2530) 30(6240,2630) 30(6340,2630) 30(6440,2630) 30(6540,2630) 30(6640,2630) 30(6740,2630) 30(6840,2630) 30(6940,2630) 30(7040,2630) 30(7140,2630) 30(7240,2630) 30(7340,2630) 31(6240,2730) 31(6340,2730) 31(6440,2730) 31(6540,2730) 31(6640,2730) 31(6740,2730) 31(6840,2730) 31(6940,2730) 31(7040,2730) 31(7140,2730) 31(7240,2730) 31(7340,2730) 32(6240,2830) 32(6340,2830) 32(6440,2830) 32(6540,2830) 32(6640,2830) 32(6740,2830) 32(6840,2830) 32(6940,2830) 32(7040,2830) 32(7140,2830) 32(7240,2830) 32(7340,2830) 33(6240,2930) 33(6340,2930) 33(6440,2930) 33(6540,2930) 33(6640,2930) 33(6740,2930) 33(6840,2930) 33(6940,2930) 33(7040,2930) 33(7140,2930) 33(7240,2930) 33(7340,2930) 34(6240,3030) 34(6340,3030) 34(6440,3030) 34(6540,3030) 34(6640,3030) 34(6740,3030) 34(6840,3030) 34(6940,3030) 34(7040,3030) 34(7140,3030) 34(7240,3030) 34(7340,3030) 35(6240,3130) 35(6340,3130) 35(6440,3130) 35(6540,3130) 35(6640,3130) 35(6740,3130) 35(6840,3130) 35(6940,3130) 35(7040,3130) 35(7140,3130) 35(7240,3130) 35(7340,3130) 36(6240,3230) 36(6340,3230) 36(6440,3230) 36(6540,3230) 36(6640,3230) 36(6740,3230) 36(6840,3230) 36(6940,3230) 36(7040,3230) 36(7140,3230) 36(7240,3230) 36(7340,3230) 37(6240,3330) 37(6340,3330) 37(6440,3330) 37(6540,3330) 37(6640,3330) 37(6740,3330) 37(6840,3330) 37(6940,3330) 37(7040,3330) 37(7140,3330) 37(7240,3330) 37(7340,3330) 38(6240,3430) 38(6340,3430) 38(6440,3430) 38(6540,3430) 38(6640,3430) 38(6740,3430) 38(6840,3430) 38(6940,3430) 38(7040,3430) 38(7140,3430) 38(7240,3430) 38(7340,3430) 39(6240,3530) 39(6340,3530) 39(6440,3530) 39(6540,3530) 39(6640,3530) 39(6740,3530) 39(6840,3530) 39(6940,3530) 39(7040,3530) 39(7140,3530) 39(7240,3530) 39(7340,3530)

## Nets (pads, with @x,y where several pads share a name; then routed paths per layer and width w, separated by ;. In a path a pad name is that pad's centre, name@x,y a point inside that pad or via, vN(x,y) a via of type N, cw(c..) or ccw(c..) an arc to the next point about the centre after c; other vN are vias at no path point)
3.3V: LED2.1
A0: U3.9 U4.12 U12.3 U14.12 U18.12
A1: U4.13 U12.6 U14.11 U18.11
A2: U4.14 U12.13 U14.10 U18.10
A3: U4.15 U12.10 U14.9 U18.9
A4: U4.16 U14.8 U16.3 U18.8
A5: U4.17 U14.7 U16.6 U18.7
A6: U4.18 U14.6 U16.13 U18.6
A7: U4.19 U14.5 U16.10 U18.5
A8: U8.18 U14.27 U17.3 U18.27
A9: J1.35 U8.17 U14.26 U17.6 U18.26
A10: J1.33 U8.16 U12.2 U14.23 U18.23
A11: J1.36 U8.15 U12.5 U14.25 U18.25
A12: U8.14 U12.14 U14.4 U18.4
A13: U8.13 U12.11 U14.28 U18.28
A14: U8.12 U14.29 U16.2 U18.3
A15: U8.11 U14.3 U16.5 U18.31
A16: U10.19 U14.2 U16.14 U18.2
A17: U10.18 U14.30 U16.11 U18.1
A18: U10.17 U17.2
A19: U10.16 U17.5
AGND: C33.1 C34.1 C35.1 C36.1 C37.1 C38.1 C39.1 C46.2 C47.2 C48.2 C49.2 pad.26@7240,2230 pad.26@7340,2230 R13.1 R41.1 R50.1 R56.1 U23.1 U23.4 U23.7 U23.10 U23.13 U24.18 U24.21 U24.25 U25.1 U25.4 U25.7 U25.10 U25.13
ALE: U3.3 U11.12
CLK: U3.11 U11.14 U27.1
CPU_A8: U8.2 U9.16
CPU_A9: U8.3 U9.14
CPU_A10: U8.4 U9.12
CPU_A11: U8.5 U9.10
CPU_A12: U8.6 U9.7
CPU_A13: U8.7 U9.5
CPU_A14: U8.8 U9.3
CPU_A15: U8.9 U9.1
CPU_A16: U9.68 U10.2
CPU_A17: U9.67 U10.3
CPU_A18: U9.66 U10.4
CPU_A19: U9.65 U10.5
CPU_AD0: U2.2 U4.9 U9.17
CPU_AD1: U2.3 U4.8 U9.15
CPU_AD2: U2.4 U4.7 U9.13
CPU_AD3: U2.5 U4.6 U9.11
CPU_AD4: U2.6 U4.5 U9.8
CPU_AD5: U2.7 U4.4 U9.6
CPU_AD6: U2.8 U4.3 U9.4
CPU_AD7: U2.9 U4.2 U9.2
CPU_ALE: U4.11 U9.61 U10.11 U11.8
CPU_CLK: U9.56 U11.6
CPU_DEN: U2.19 U9.39
CPU_DTR: U2.1 U9.40 U11.11
CPU_RD: U9.62 U11.2
CPU_WR: U9.63 U11.4
D0: J4.2 U2.18 U13.3 U14.13 U15.5 U15.24 U18.13 U19.12 U20.2 U21.11 U25.5
D1: U2.17 U13.6 U14.14 U15.6 U15.23 U18.14 U19.13 U20.3 U21.12
D2: U2.16 U13.10 U14.15 U15.8 U15.21 U18.15 U19.14 U20.4 U21.13
D3: U2.15 U13.13 U14.17 U15.9 U15.20 U18.17 U19.19 U20.5 U21.14
D4: U2.14 U13.16 U14.18 U15.10 U15.19 U18.18 U19.18 U20.6
D5: U2.13 U13.20 U14.19 U15.12 U15.17 U18.19 U19.17 U20.7
D6: U2.12 U13.23 U14.20 U15.13 U15.16 U18.20 U19.16 U20.8
D7: U2.11 U13.25 U14.21 U15.14 U15.15 U18.21 U19.15 U20.9
DEN: U3.4
DISP_CS: LCD1.4 U27.17
DISP_DIR: U20.1 U27.19
DISP_E: LCD1.6 U27.15
DISP_RW: LCD1.5 U27.16
DRAM_CAS: R58.2 U3.19
DRAM_RAS: R57.2 U3.22
DRAM_WE: R59.2 U3.20
DTR: U3.44 U11.9 U27.6
GND: C0.2 C1.2 C2.1 C3.2 C4.1 C5.1 C6.1 C7.1 C8.1 C9.1 C10.1 C11.1 C12.1 C13.1 C14.1 C15.1 C16.1 C17.1 C18.1 C19.1 C20.1 C21.1 C22.1 C23.1 C24.1 C25.1 C26.1 C27.1 C28.1 C29.1 C30.1 C31.1 C32.1 C40.1 C50.2 C51.2 J1.2 J1.19 J1.22 J1.24 J1.26 J1.28 J1.30 J1.40 MicroB.5 pad.26@6240,2230 pad.26@6340,2230 pad.26@6440,2230 pad.26@6540,2230 pad.26@6640,2230 pad.26@6740,2230 pad.26@6840,2230 pad.26@6940,2230 pad.26@7040,2230 pad.26@7140,2230 PB1.1 PB2.1 PB3.1 PB4.1 PB5.1 PB6.1 PB8.1 R2.2 R12.1 R26.2 R28.2 R29.2 R31.2 R32.2 R40.1 R42.2 R44.2 R45.2 R48.2 R49.1 R55.2 R56.2 R60.1 R61.1 R62.1 R63.2 R64.2 RE1.2 RE1.5 RE2.2 RE2.5 RP1.1 RP1.4 RP1.8 RP3.1 RP3.2 RP3.4 RP3.5 RP3.7 RP3.8 U2.10 U3.1 U3.23 U4.1 U4.10 U6.3 U7.1 U8.10 U8.19 U9.26 U9.60 U10.1 U10.10 U11.1 U11.10 U11.19 U12.8 U12.15 U13.9 U13.22 U14.16 U15.4 U15.11 U15.18 U15.25 U15.32 U15.39 U15.46 U15.53 U16.8 U16.15 U17.8 U17.10 U17.11 U17.13 U17.14 U17.15 U18.16 U19.10 U20.10 U20.19 U21.10 U22.2 U24.6 U24.10 U24.27 U27.10 X1.2 X2.2
IDE_1DIR: U3.8 U15.1
IDE_1OE: U3.7 U15.56
IDE_2CLKBA: U3.6 U15.30
IDE_2OE: U3.16 U15.29
IDE_CS0: J1.37 U3.17
IDE_DIOR: J1.23 U3.15
IDE_DIOW: J1.25 U3.21
INT0: U9.45 U19.11
INT1: U9.44 U11.7
INT2: U9.42 U11.5
LCS: U9.33 U18.22
MCS0: U3.39 U9.38
MCS1: U3.37 U9.37
MCS2: U3.38 U9.36
MCS3: U3.43 U9.35
MP3_CLK: J4.1 U3.31 U25.2
MP3_DEMAND: J4.3 R24.2 U11.15
MP3_DREQ: U11.13 U24.1
MP3_XCS: U3.32 U23.9
MP3_XDCS: U3.30 U23.12
MUX_S: U3.18 U12.1 U16.1 U17.1
NetC44_1: C44.1 U24.20
NetC44_2: C44.2 J2.D R52.2
NetC45_1: C45.1 U24.24
NetC45_2: C45.2 J2.A R51.2
NetC46_1: C46.1 U24.22
NetC47_1: C47.1 R51.1
NetC48_1: C48.1 R52.1
NetC49_1: C49.1 R53.1
NetJ1_3: J1.3 U15.43
NetJ1_4: J1.4 U15.33
NetJ1_5: J1.5 U15.44
NetJ1_6: J1.6 U15.34
NetJ1_7: J1.7 U15.45
NetJ1_8: J1.8 U15.36
NetJ1_9: J1.9 U15.47
NetJ1_10: J1.10 U15.37
NetJ1_11: J1.11 U15.48
NetJ1_12: J1.12 U15.38
NetJ1_13: J1.13 U15.49
NetJ1_14: J1.14 U15.40
NetJ1_15: J1.15 U15.51
NetJ1_16: J1.16 U15.41
NetJ1_17: J1.17 U15.52
NetJ1_18: J1.18 U15.42
NetJ1_29: J1.29 R23.1
NetJ1_38: J1.38 R30.1
NetJ2_E: J2.E R53.2
NetJP1_1: JP1.1 U7.3
NetJP1_2: JP1.2 U9.46
NetJP1_3: JP1.3 R8.1
NetLCD1_3: LCD1.3 P3.2
NetLCD1_7: LCD1.7 U20.18
NetLCD1_8: LCD1.8 U20.17
NetLCD1_9: LCD1.9 U20.16
NetLCD1_10: LCD1.10 U20.15
NetLCD1_11: LCD1.11 U20.14
NetLCD1_12: LCD1.12 U20.13
NetLCD1_13: LCD1.13 U20.12
NetLCD1_14: LCD1.14 U20.11
NetLCD1_15: LCD1.15 R37.1
NetLCD1_16: LCD1.16 R42.1
NetLED1_2: LED1.2 R40.2
NetLED2_2: LED2.2 R41.2
NetP3_1: P3.1 R44.3
NetP3_3: P3.3 U22.5
NetPB1_2: PB1.2 U19.6
NetPB2_2: PB2.2 U19.5
NetPB3_2: PB3.2 U19.4
NetPB4_2: PB4.2 U19.3
NetPB5_2: PB5.2 U19.2
NetPB6_2: PB6.2 U19.7
NetPB7_2: PB7.2 R1.2 R2.1 U6.2
NetPB8_2: PB8.2 U7.2
NetR5_2: R5.2 U3.13
NetR11_2: R11.2 U8.1
NetR12_2: R12.2 U24.16
NetR13_2: R13.2 U25.9
NetR14_2: R14.2 U3.33
NetR15_2: R15.2 U3.2
NetR16_2: R16.2 U3.36
NetR17_2: R17.2 U3.24
NetR19_2: R19.2 U3.14
NetR26_1: R26.1 U22.6
NetR28_1: R28.1 U3.27
NetR29_1: R29.1 U3.25
NetR31_1: R31.1 U3.26
NetR32_1: R32.1 U3.29
NetR35_1: R35.1 U18.30
NetR43_2: R43.2 U21.19
NetR45_1: R45.1 R54.1 U26.1
NetR46_2: R46.2 X1.1
NetR47_2: R47.2 X2.1
NetR48_1: R48.1 U3.28
NetR49_2: R49.2 U24.17
NetR50_2: R50.2 U25.12
NetR55_1: R55.1 U3.10
NetR57_1: R57.1 U13.27
NetR58_1: R58.1 U13.2
NetR59_1: R59.1 U13.21
NetR60_2: R60.2 U27.7
NetR61_2: R61.2 U27.8
NetR62_2: R62.2 U27.9
NetR63_1: R63.1 U27.12
NetR64_1: R64.1 U27.11
NetRE1_1: RE1.1 RP4.9 U21.9
NetRE1_3: RE1.3 RP4.10 U21.8
NetRE1_4: RE1.4 U19.8
NetRE2_1: RE2.1 RP4.11 U21.7
NetRE2_3: RE2.3 RP4.12 U21.6
NetRE2_4: RE2.4 U19.9
NetRP1_9: RP1.9 U9.55
NetRP1_10: RP1.10 U9.50
NetRP1_11: RP1.11 U9.41
NetRP1_13: RP1.13 U9.19
NetRP1_14: RP1.14 U9.21
NetRP1_15: RP1.15 U9.20
NetRP1_16: RP1.16 U9.18
NetRP3_9: RP3.9 U15.2
NetRP3_10: RP3.10 U15.3
NetRP3_11: RP3.11 U15.26
NetRP3_12: RP3.12 U15.27
NetRP3_13: RP3.13 U15.28
NetRP3_14: RP3.14 U15.31
NetRP3_15: RP3.15 U15.54
NetRP3_16: RP3.16 U15.55
NetRP4_13: RP4.13 U21.5
NetRP4_14: RP4.14 U21.4
NetRP4_15: RP4.15 U21.3
NetRP4_16: RP4.16 U21.2
NetU3_5: U3.5 U27.2
NetU9_47: U9.47 U9.57
NetU9_59: U9.59 X1.3
NetU12_4: U12.4 U13.4
NetU12_7: U12.7 U13.5
NetU12_9: U12.9 U13.8
NetU12_12: U12.12 U13.7
NetU13_11: U13.11 U16.4
NetU13_12: U13.12 U16.7
NetU13_14: U13.14 U16.12
NetU13_15: U13.15 U16.9
NetU13_17: U13.17 U17.4
NetU13_18: U13.18 U17.7
NetU23_2: U23.2 X2.3
NetU23_3: U23.3 U24.8
NetU23_6: U23.6 U24.26
NetU23_8: U23.8 U24.11
NetU23_11: U23.11 U24.4
NetU24_2: U24.2 U24.12 U25.3
NetU24_3: U24.3 U24.13 U25.6
PCS0: U9.25 U21.1
PCS1: U9.27 U19.1
PCS2: U3.41 U9.28
PCS3: U3.42 U9.29
PCS4: U3.40 U9.30
PCS5: U9.31 U27.4
PCS6: U9.32 U27.3
POT_CS: U22.4 U27.14
POT_UD: U22.3 U27.13
RD: U11.18 U14.24 U18.24
RESET: J1.1 U3.35 U6.7 U9.24 U23.5 U27.5
RP1: RP5.2 U10.6
RP2: RP5.3 U10.7
RP3: RP5.4 U10.8
RP4: RP5.5 U10.9
RP5: RP5.1 U11.17
SRDY: U9.49 U27.18
UCS: U9.34 U14.22
V3.3: C33.2 C34.2 C35.2 C36.2 C37.2 C38.2 C39.2 C51.1 pad.39@7240,3530 pad.39@7340,3530 R54.2 U23.14 U24.5 U24.9 U24.15 U24.19 U24.23 U24.28 U25.14 U26.2
VCC: C0.1 C1.1 C2.2 C3.1 C4.2 C5.2 C6.2 C7.2 C8.2 C9.2 C10.2 C11.2 C12.2 C13.2 C14.2 C15.2 C16.2 C17.2 C18.2 C19.2 C20.2 C21.2 C22.2 C23.2 C24.2 C25.2 C26.2 C27.2 C28.2 C29.2 C30.2 C31.2 C32.2 C40.2 C50.1 J1.20 LCD1.1 LCD1.2 LED1.1 MicroB.1 pad.39@6240,3530 pad.39@6340,3530 pad.39@6440,3530 pad.39@6540,3530 pad.39@6640,3530 pad.39@6740,3530 pad.39@6840,3530 pad.39@6940,3530 pad.39@7040,3530 pad.39@7140,3530 PB7.1 R1.1 R5.1 R8.2 R11.1 R14.1 R15.1 R16.1 R17.1 R19.1 R23.2 R24.1 R30.2 R35.2 R37.2 R43.1 R44.1 R46.1 R47.1 RP1.2 RP1.3 RP1.6 RP1.7 RP3.3 RP3.6 RP4.1 RP4.2 RP4.3 RP4.4 RP4.5 RP4.6 RP4.7 RP4.8 RP5.12 RP5.13 RP5.14 RP5.15 RP5.16 U2.20 U3.12 U3.34 U4.20 U7.4 U8.20 U9.9 U9.43 U10.20 U11.20 U12.16 U13.1 U13.30 U14.1 U14.32 U15.7 U15.22 U15.35 U15.50 U16.16 U17.16 U18.32 U19.20 U20.20 U21.20 U22.1 U26.3 U27.20 X1.4 X2.4
WR: U11.16 U14.31 U18.29
pads on no net: J1.21 J1.27 J1.31 J1.32 J1.34 J1.39 J2. J2.B J2.C J4.4 J4.5 J4.6 J4.A MicroB. MicroB.2 MicroB.3 MicroB.4 PB1.3 PB1.4 PB2.3 PB2.4 PB3.3 PB3.4 PB4.3 PB4.4 PB5.3 PB5.4 PB6.3 PB6.4 RE1. RE2. RP1.5 RP1.12 RP5.6 RP5.7 RP5.8 RP5.9 RP5.10 RP5.11 U6.1 U6.4 U6.5 U6.6 U6.8 U9.22 U9.23 U9.48 U9.51 U9.52 U9.53 U9.54 U9.58 U9.64 U10.12 U10.13 U10.14 U10.15 U11.3 U13. U13.19 U13.24 U13.26 U13.28 U13.29 U17.9 U17.12 U21.15 U21.16 U21.17 U21.18 U24.7 U24.14 U25.8 U25.11 U26.0

## Keep-outs
Keep-Out Layer:
  lines w10: 1965,5505 2265,5505

## Other copper
Top Layer:
  text ".LAYER_NAME" at 10050,1200 h100
Bottom Layer:
  text ".LAYER_NAME" at 10050,1200 h100

## Silkscreen, mask and mechanical layers (free items; w line width, h text height)
Top Overlay:
  lines w10: 7190,2180 7390,2180 7390,2280 7190,2280 ; 7190,2180 7190,2280 ; 7190,2180 6190,2180 6190,2280 7190,2280 ; 7190,3480 7390,3480 7390,3580 7190,3580 ; 7190,3480 7190,3580 ; 7190,3480 6190,3480 6190,3580 7190,3580
  text "RESET" at 4255,6635 h60
  text "TRAP" at 4585,6635 h60
  text "24MHz" at 2495,6235 h60
  text "3.3V" at 1815,6085 h60
  text "5V" at 1925,5970 h60
  text "Tim Menninger" at 8320,3625 h60
  text "VCC" at 6195,3605 h60
  text "V3.3" at 7190,3605 h60
  text "Jukebox 03/2016" at 8320,3535 h60
  text "24.576MHz" at 7690,3505 h60
  text "AGND" at 7895,2530 h60 r90
  text "GND" at 7895,2120 h60 r90
  text "AGND" at 7190,2100 h60
  text "GND" at 6190,2095 h60
  text ".LAYER_NAME" at 10050,1200 h100
Bottom Overlay:
  text ".LAYER_NAME" at 10050,1200 h100
Top Solder:
  text ".LAYER_NAME" at 10050,1200 h100
Bottom Solder:
  text ".LAYER_NAME" at 10050,1200 h100
Drill Guide:
  text ".LAYER_NAME" at 10050,1200 h100
Mechanical 1:
  lines w10: 1000,800 1000,850 ; 1000,6900 1000,6950 ; 1000,7205 1000,7275 ; 1066.87,802.71 1000,825 ; 1066.87,847.29 1000,825 ; 1066.87,6902.71 1000,6925 ; 1066.87,6947.29 1000,6925 ; 1066.87,7217.71 1000,7240 ; 1066.87,7262.29 1000,7240 ; 1965,5505 1965,5805 2265,5805 2265,5505 ; 2556.61,825 1000,825 ; 2556.61,6925 1000,6925 ; 3278.39,825 4900,825 ; 3278.39,6925 4900,6925 ; 4833.13,802.71 4900,825 ; 4833.13,847.29 4900,825 ; 4833.13,6902.71 4900,6925 ; 4833.13,6947.29 4900,6925 ; 4870,7240 1000,7240 ; 4900,680 4900,880 ; 4900,6880 4900,7060 ; 4966.87,712.71 4900,735 ; 4966.87,757.29 4900,735 ; 4966.87,6992.71 4900,7015 ; 4966.87,7037.29 4900,7015 ; 5115,1000 5185,1000 ; 5115,6800 5185,6800 ; 5125,1450 5175,1450 ; 5127.71,1066.87 5150,1000 5172.29,1066.87 ; 5127.71,1383.13 5150,1450 ; 5127.71,6733.13 5150,6800 ; 5150,1003.4 5150,1450 ; 5150,6350 5150,6800 ; 5172.29,1383.13 5150,1450 ; 5172.29,6733.13 5150,6800 ; 5333.13,712.71 5400,735 ; 5333.13,757.29 5400,735 ; 5333.13,6992.71 5400,7015 ; 5333.13,7037.29 5400,7015 ; 5400,710 5400,760 ; 5400,6990 5400,7040 ; 5570,7240 9300,7240 ; 9233.13,7217.71 9300,7240 ; 9233.13,7262.29 9300,7240 ; 9300,7205 9300,7275 ; 9400,1000 9490,1000 ; 9400,6800 9490,6800 ; 9417.71,1066.87 9445,1000 ; 9417.71,6733.13 9445,6800 ; 9445,3451.61 9445,1000 ; 9445,4153.39 9445,6800 ; 9472.29,1066.87 9445,1000 ; 9472.29,6733.13 9445,6800 ; 4900,735 5400,735 ; 4900,7015 5400,7015 ; 1000,1000 1000,6800 4900,6800 4900,6350 5400,6350 5400,6800 9300,6800 9300,1000 5400,1000 5400,1450 4900,1450 4900,1000 1000,1000 ; 1965,1995 1965,2295 2265,2295 2265,1995 1965,1995 ; 8035,1995 8035,2295 8335,2295 8335,1995 8035,1995 ; 8035,5505 8035,5805 8335,5805 8335,5505 8035,5505
  text "8300mil" at 4911.61,7206.56 h100
  text "500mil" at 4991.6,7056.56 h60
  text "3900mil" at 2611.61,6891.56 h100
  text "5800mil" at 9411.56,4113.39 h100 r270
  text "450mil" at 5031.56,1383.4 h60 r270
  text ".LAYER_NAME" at 10050,1200 h100
  text "3900mil" at 2611.61,791.56 h100
  text "500mil" at 4991.6,776.56 h60
Mechanical 3:
  text ".LAYER_NAME" at 10050,1200 h100
Mechanical 4:
  lines w30: 985,1195 985,985 1195,985 ; 985,6605 985,6815 1195,6815 ; 9105,985 9315,985 9315,1195
Drill Drawing:
  text ".LAYER_NAME" at 10050,1200 h100

## Text inside footprints (layer, text, board x,y; h text height)
C0: Top Overlay "+" at 1560,6660 h70 r90
C44: Top Overlay "+" at 9200,1610 h70
C45: Top Overlay "+" at 8900,1615 h70